# Altium PCB LED-Holder_5mm.PcbDoc
Units mm, origin at the board's own origin, x right, y up, seen from the top; angles counter-clockwise.
Board outline 15 x 10 mm, 2 copper layers (Top Layer, Bottom Layer); 2 components, 4 nets, 9 pads, 0 vias.
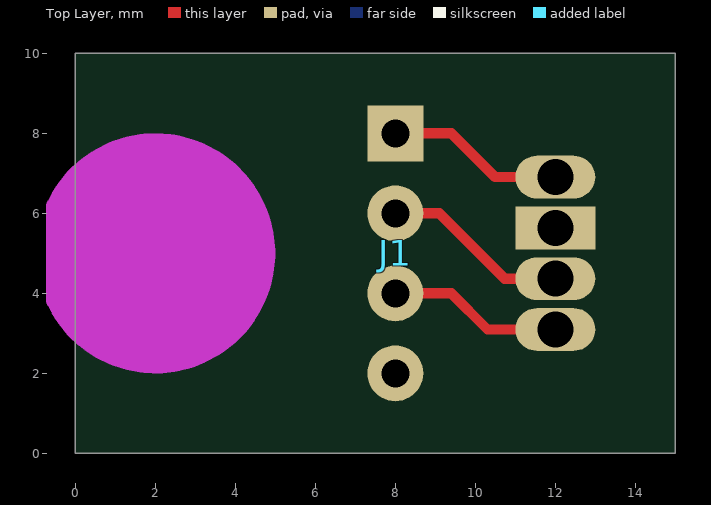
[diagram p0: Top Layer view]
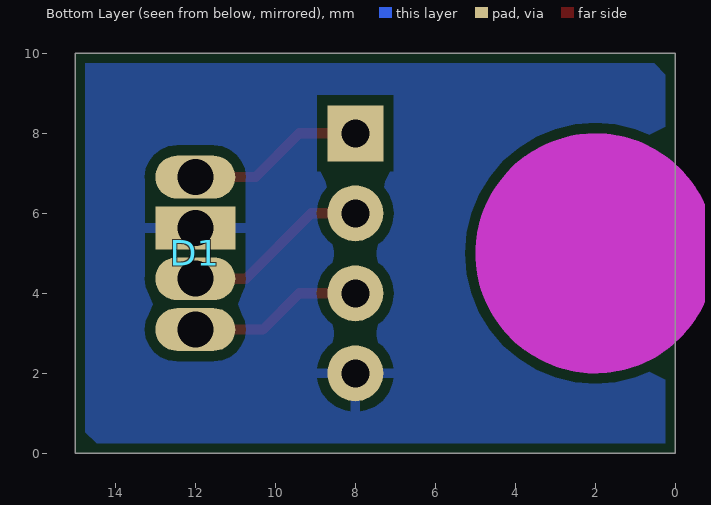
[diagram p1: Bottom Layer view, seen from below]

## Layer stack, top to bottom
Top Solder: solder mask 0.0102, Solder Resist, Dk 3.5
Top Layer: signal copper 0.0356
Dielectric 1: dielectric 0.32, FR-4, Dk 4.8
Bottom Layer: signal copper 0.0356
Bottom Solder: solder mask 0.0102, Solder Resist, Dk 3.5

## Board outline
0,0 15,0 15,10 0,10 0,0

## Design rules (kind name [scope] priority, off if disabled: settings)
Clearance [All] p1: gap=0.254
PolygonConnect [All] p1: connectstyle=Relief reliefconductorwidth=0.254 reliefentries=4 polygonreliefangle="90 Angle" airgapwidth=0.254
RoutingVias [All] p1: holewidth=0.711 width=1.27 viastyle="Through Hole" minholewidth=0.711 minwidth=1.27 maxholewidth=0.711 maxwidth=1.27
SolderMaskExpansion [All] p1: expansion=0.102
Width [All] p1: maxlimit=0.254 minlimit=0.254 preferedwidth=0.254
30 further rules are at their usual default settings.

## Components (designator, comment, footprint, x,y, rotation, side; value= is the part's Value field where it differs from the comment)
D1 "RGB LED CA" "RGB-LED_Through Hole" 12,5 r270 bottom
J1 "4PConnector" JST_B4B-PH-K-S 8,5 r180 top

## Footprints (in the part's own frame and the unit in brackets; to place one, negate y for a bottom-side part, rotate by r counter-clockwise, add the part's x,y. Pads: shape width x height; smd on the part's side, far side on the other; paste and mask are expansions set on the pad)
JST_B4B-PH-K-S [mm] "JST 2mm Pitch"
  rect 1.4x1.4 hole 0.7: 1(0,-3)
  round 1.4 hole 0.7: 2(0,-1) 3(0,1) 4(0,3)
  body extent -1.7,-4.95 2.8,4.95, height 6
"RGB-LED_Through Hole" [mm] "5mm 4-Pin LED"
  oval 1.07x2 hole 0.9: 1(-1.905,0) 3(0.635,0) 4(1.905,0)
  rect 1.07x2 hole 0.9: 2(-0.635,0)
  body extent -2.95,-2.95 2.95,2.95, height 8.7

## Part data
D1: library part 3000, "5mm"
J1: library part 3001, "JST PH-Series 2mm Pitch"

## Free pads (board coordinates)
  round 0 hole 2.5 unplated: 0(2,5)

## Nets (pads, with @x,y where several pads share a name; then routed paths per layer and width w, separated by ;. In a path a pad name is that pad's centre, name@x,y a point inside that pad or via, vN(x,y) a via of type N, cw(c..) or ccw(c..) an arc to the next point about the centre after c; other vN are vias at no path point)
NetD1_1: D1.1 J1.1 | length 4.5
  Top Layer w0.254: J1.1 9.4,8 10.495,6.905 D1.1
NetD1_2: D1.2 J1.4
NetD1_3: D1.3 J1.2 | length 4.7
  Top Layer w0.254: J1.2 9.1,6 10.735,4.365 D1.3
NetD1_4: D1.4 J1.3 | length 4.4
  Top Layer w0.254: J1.3 9.4,4 10.305,3.095 D1.4

## Polygon pours and split planes (outlines as drawn)
NetD1_2 on Bottom Layer "GND PLANE" (solid, pour order 2): 14.75,0.25 14.75,9.75 0.25,9.75 0.25,0.25

## Keep-outs
Keep-Out Layer:
  circle w3: c2,5 r1.5

## Silkscreen, mask and mechanical layers (free items; w line width, h text height)
Mechanical 2:
  the board outline again, w0.2